# EAGLE board OSO-MISC-20-010 Sensor board for garden (EAGLE 9.4.2)
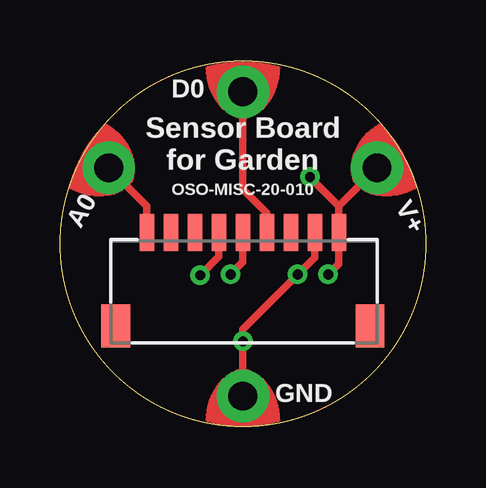
[diagram p0: board, top side]
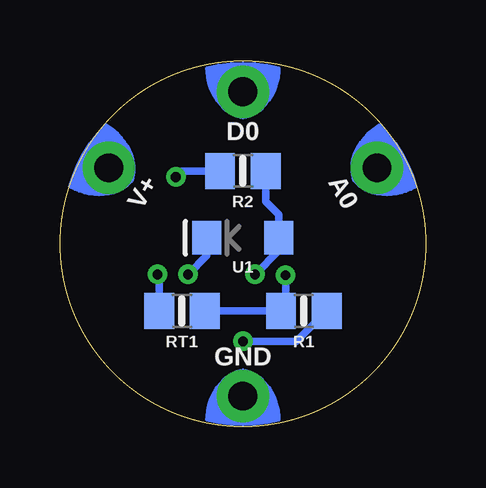
[diagram p1: board, bottom side, seen from below]

Size 15.24 x 15.24 mm. Coordinates in mm from the lower left corner, seen from the top.
Outline: circle at 7.62,7.62 radius 7.62
Copper layers (1*16): Top 0.035mm / dielectric 1.5mm / Bottom 0.035mm
Design rules "default": minimum track width 8mil, minimum drill 16mil, track to track 8mil, track to pad 8mil, pad to pad 8mil, via to via 8mil, smd to smd 8mil, copper to edge 10mil, drill to drill 8mil, minimum pad ring 10mil, minimum via ring 8mil, stop-mask expansion 4mil, vias tented up to drill 20mil, thermal gap 10mil
Net classes: 0 default: width 0.152 mm, drill 0.254 mm; 1 power: width 0.305 mm, drill 0.305 mm

## Footprints (pad centres in the part's own frame; a part is rotated, then mirrored left to right if it is on the bottom)
JST_SH9 = smd 0.6 x 1.55: 1 -4,2.514; 2 -3,2.514; 3 -2,2.514; 4 -1,2.514; 5 0,2.514; 6 1,2.514; 7 2,2.514; 8 3,2.514; 9 4,2.514 | smd 1.2 x 1.8: MT1 -5.3,-1.386; MT2 5.3,-1.386
0805-NO = smd 1.24 x 1.5: 1 -0.95,0; 2 0.95,0
SEWINGTAP_0.5 = drill 1.2 pad 2.184: TAP 0,0
LED-1206 = smd 1.2 x 1.4: A -1.5,0; C 1.5,0

## Placement (x,y rotation side)
JP1  [JST_SH9]  7.62,5.59 0 top
R1  10K  [0805-NO]  5.08,4.83 0 bottom
R2  10K  [0805-NO]  7.62,10.67 0 bottom
RT1  NTC 10K  [0805-NO]  10.16,4.83 0 bottom
TP1  SEWTAP0.5IN  [SEWINGTAP_0.5]  2.03,10.79 60 top
TP2  SEWTAP0.5IN  [SEWINGTAP_0.5]  7.62,13.97 0 top
TP3  SEWTAP0.5IN  [SEWINGTAP_0.5]  13.21,10.79 300 top
TP4  SEWTAP0.5IN  [SEWINGTAP_0.5]  7.62,1.27 180 top
U1  PT15-21C  [LED-1206]  7.62,7.87 180 bottom

## Library data of the parts
JP1 R1 R2 RT1 = microbuilder
TP1-TP4 = adafruit
U1 = SparkFun-Sensors

## Nets
A0: JP1.1 TP1.TAP
AVCC [power]: JP1.9 R2.1 RT1.1 TP3.TAP
GND: JP1.8 R1.2 TP4.TAP U1.C
N$1: JP1.6 TP2.TAP
OPTO: JP1.5 R2.2 U1.A
SCL: JP1.2
SDA: JP1.3
TEMP: JP1.4 R1.1 RT1.2

## Tracks (layer width: path | path; a pad name or v marks a point on that pad's centre or on a via)
A0
  Top 0.305: JP1.1 3.62,9.21 TP1.TAP
AVCC  (via drill 0.41)
  Top 0.305: TP3.TAP 11.62,9.21 | 11.62,9.21 JP1.9 11.62,6.79 v11.18,6.35 | 11.62,9.21 v10.41,10.41
  Bottom 0.305: v11.18,6.35 11.11,6.28 RT1.1 | v10.41,10.41 10.16,10.67 R2.1
GND  (via drill 0.41)
  Top 0.305: JP1.8 10.62,7.06 v9.91,6.35 7.62,4.06 v7.62,3.56 TP4.TAP
  Bottom 0.305: R1.2 5.4,3.56 v7.62,3.56 | U1.C 9.12,7.14 v9.91,6.35
N$1
  Top 0.305: JP1.6 8.62,8.91 7.62,9.91 TP2.TAP
OPTO  (via drill 0.41)
  Top 0.305: v7.11,6.35 7.62,6.86 JP1.5
  Bottom 0.305: R2.2 6.67,9.4 6.12,8.85 U1.A 6.12,7.34 v7.11,6.35
TEMP  (via drill 0.41)
  Top 0.305: v5.84,6.31 6.62,7.09 JP1.4
  Bottom 0.305: RT1.2 R1.1 5.84,5.01 v5.84,6.31

## Text on the board
tPlace: D0 | Sensor Board / for Garden | OSO-MISC-20-010 | A0 | V+ | GND
bPlace: D0 | A0 | V+ | GND